# EAGLE board Layout (EAGLE 7.2.0)
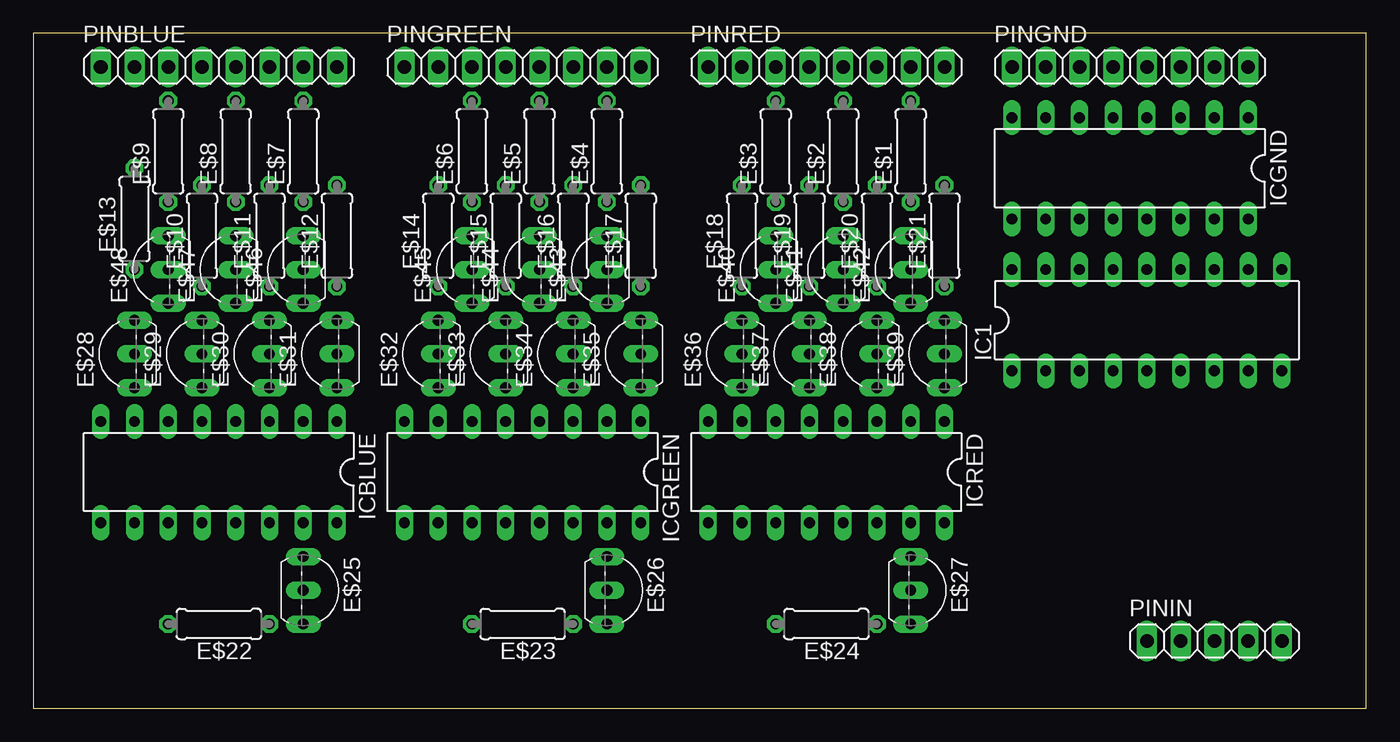
[diagram p0: board, top side]
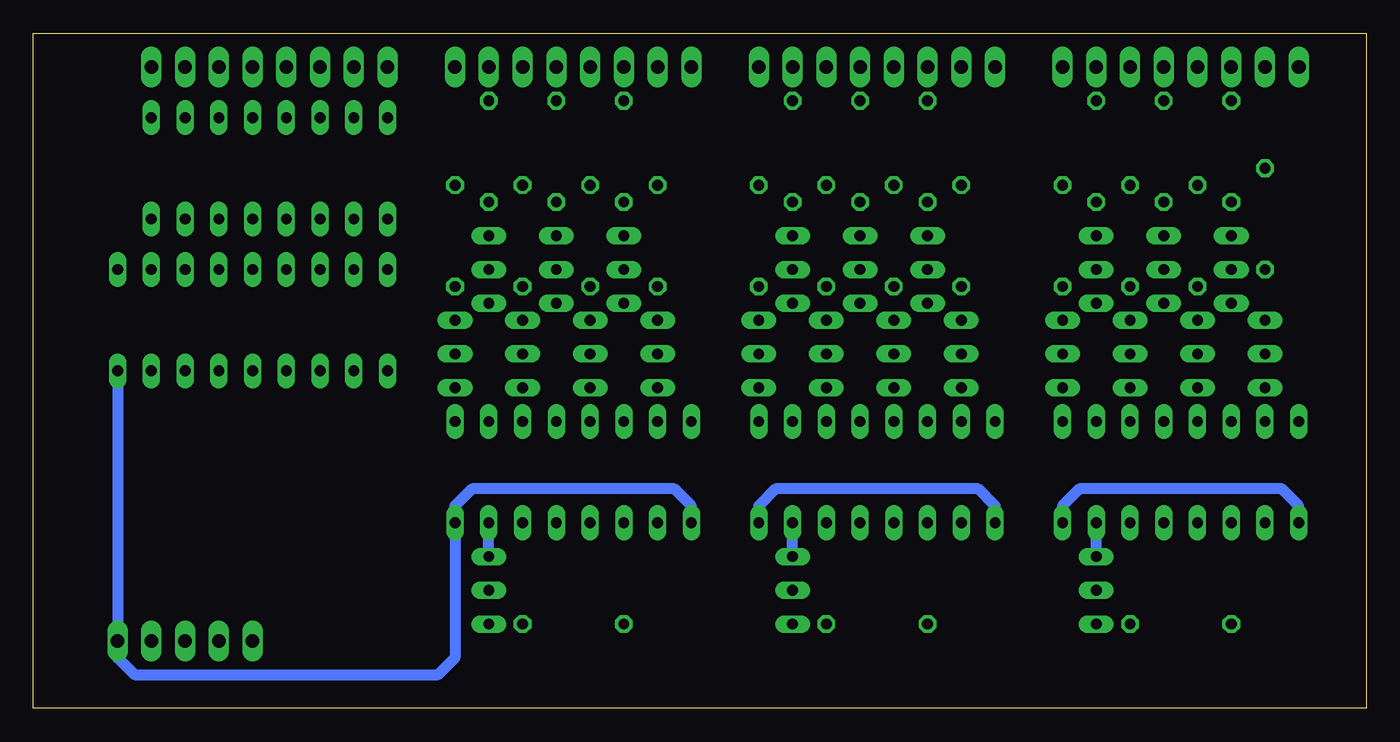
[diagram p1: board, bottom side, seen from below]

Size 100.33 x 50.8 mm. Coordinates in mm from the lower left corner, seen from the top.
Outline: 0,0 100.33,0 100.33,50.8 0,50.8 0,0
Copper layers (1*16): Top 0.035mm / dielectric 1.5mm / Bottom 0.035mm
Design rules "default": minimum track width 10mil, minimum drill 24mil, track to track 8mil, track to pad 8mil, pad to pad 8mil, via to via 8mil, smd to smd 8mil, copper to edge 40mil, drill to drill 8mil, minimum pad ring 10mil, minimum via ring 8mil, stop-mask expansion 4mil, vias tented up to drill 0mil, thermal gap 10mil

## Footprints (pad centres in the part's own frame; a part is rotated, then mirrored left to right if it is on the bottom)
0207/7 = drill 0.813 octagon: 1 -3.81,0; 2 3.81,0
TO92-BCE = drill 0.813 long: B 2.54,0; C 0,0; E -2.54,0
DIL18 = drill 0.813 long: 1 -10.16,-3.81; 2 -7.62,-3.81; 3 -5.08,-3.81; 4 -2.54,-3.81; 5 0,-3.81; 6 2.54,-3.81; 7 5.08,-3.81; 8 7.62,-3.81; 9 10.16,-3.81; 10 10.16,3.81; 11 7.62,3.81; 12 5.08,3.81; 13 2.54,3.81; 14 0,3.81; 15 -2.54,3.81; 16 -5.08,3.81; 17 -7.62,3.81; 18 -10.16,3.81
DIL16 = drill 0.813 long: 1 -8.89,-3.81; 2 -6.35,-3.81; 3 -3.81,-3.81; 4 -1.27,-3.81; 5 1.27,-3.81; 6 3.81,-3.81; 7 6.35,-3.81; 8 8.89,-3.81; 9 8.89,3.81; 10 6.35,3.81; 11 3.81,3.81; 12 1.27,3.81; 13 -1.27,3.81; 14 -3.81,3.81; 15 -6.35,3.81; 16 -8.89,3.81
1X08 = drill 1.016 long: 1 -8.89,0; 2 -6.35,0; 3 -3.81,0; 4 -1.27,0; 5 1.27,0; 6 3.81,0; 7 6.35,0; 8 8.89,0
1X05 = drill 1.016 long: 1 -5.08,0; 2 -2.54,0; 3 0,0; 4 2.54,0; 5 5.08,0

## Placement (x,y rotation side)
E$1  [0207/7]  66.04,41.91 90 top
E$2  [0207/7]  60.96,41.91 90 top
E$3  [0207/7]  55.88,41.91 90 top
E$4  [0207/7]  43.18,41.91 90 top
E$5  [0207/7]  38.1,41.91 90 top
E$6  [0207/7]  33.02,41.91 90 top
E$7  [0207/7]  20.32,41.91 90 top
E$8  [0207/7]  15.24,41.91 90 top
E$9  [0207/7]  10.16,41.91 90 top
E$10  [0207/7]  12.7,35.56 90 top
E$11  [0207/7]  17.78,35.56 90 top
E$12  [0207/7]  22.86,35.56 90 top
E$13  [0207/7]  7.62,36.83 90 top
E$14  [0207/7]  30.48,35.56 90 top
E$15  [0207/7]  35.56,35.56 90 top
E$16  [0207/7]  40.64,35.56 90 top
E$17  [0207/7]  45.72,35.56 90 top
E$18  [0207/7]  53.34,35.56 90 top
E$19  [0207/7]  58.42,35.56 90 top
E$20  [0207/7]  63.5,35.56 90 top
E$21  [0207/7]  68.58,35.56 90 top
E$22  [0207/7]  13.97,6.35 180 top
E$23  [0207/7]  36.83,6.35 180 top
E$24  [0207/7]  59.69,6.35 180 top
E$25  [TO92-BCE]  20.32,8.89 270 top
E$26  [TO92-BCE]  43.18,8.89 270 top
E$27  [TO92-BCE]  66.04,8.89 270 top
E$28  [TO92-BCE]  7.62,26.67 90 top
E$29  [TO92-BCE]  12.7,26.67 90 top
E$30  [TO92-BCE]  17.78,26.67 90 top
E$31  [TO92-BCE]  22.86,26.67 90 top
E$32  [TO92-BCE]  30.48,26.67 90 top
E$33  [TO92-BCE]  35.56,26.67 90 top
E$34  [TO92-BCE]  40.64,26.67 90 top
E$35  [TO92-BCE]  45.72,26.67 90 top
E$36  [TO92-BCE]  53.34,26.67 90 top
E$37  [TO92-BCE]  58.42,26.67 90 top
E$38  [TO92-BCE]  63.5,26.67 90 top
E$39  [TO92-BCE]  68.58,26.67 90 top
E$40  [TO92-BCE]  55.88,33.02 90 top
E$41  [TO92-BCE]  60.96,33.02 90 top
E$42  [TO92-BCE]  66.04,33.02 90 top
E$43  [TO92-BCE]  43.18,33.02 90 top
E$44  [TO92-BCE]  38.1,33.02 90 top
E$45  [TO92-BCE]  33.02,33.02 90 top
E$46  [TO92-BCE]  20.32,33.02 90 top
E$47  [TO92-BCE]  15.24,33.02 90 top
E$48  [TO92-BCE]  10.16,33.02 90 top
IC1  ULN2803A  [DIL18]  83.82,29.21 0 top
ICBLUE  74HC595  [DIL16]  13.97,17.78 180 top
ICGND  74HC595  [DIL16]  82.55,40.64 180 top
ICGREEN  74HC595  [DIL16]  36.83,17.78 180 top
ICRED  74HC595  [DIL16]  59.69,17.78 180 top
PINBLUE  [1X08]  13.97,48.26 0 top
PINGND  [1X08]  82.55,48.26 0 top
PINGREEN  [1X08]  36.83,48.26 0 top
PININ  [1X05]  88.9,5.08 0 top
PINRED  [1X08]  59.69,48.26 0 top

## Library data of the parts
E$1-E$24 = resistor
E$25-E$48 = transistor-npn
IC1 ICBLUE ICGND ICGREEN ICRED = analog-devices
PINBLUE PINGND PINGREEN PININ PINRED = pinhead

## Nets
S$1: IC1.9 ICRED.9 ICRED.16 PININ.5
S$2: ICGREEN.9 ICGREEN.16
S$3: ICBLUE.9 ICBLUE.16
S$4: E$26.E ICGREEN.15
S$5: E$27.E ICRED.15
S$6: E$25.E ICBLUE.15

## Tracks (layer width: path | path; a pad name or v marks a point on that pad's centre or on a via)
S$1
  Bottom 0.813: ICRED.9 50.8,15.24 52.07,16.51 67.31,16.51 68.58,15.24 ICRED.16 68.58,3.81 69.85,2.54 92.71,2.54 93.98,3.81 PININ.5 IC1.9
S$2
  Bottom 0.813: ICGREEN.9 27.94,15.24 29.21,16.51 44.45,16.51 45.72,15.24 ICGREEN.16
S$3
  Bottom 0.813: ICBLUE.9 5.08,15.24 6.35,16.51 21.59,16.51 22.86,15.24 ICBLUE.16
S$4
  Bottom 0.813: E$26.E ICGREEN.15
S$5
  Bottom 0.813: E$27.E ICRED.15
S$6
  Bottom 0.813: E$25.E ICBLUE.15